# Altium PCB PCB1.PcbDoc
Units mil, origin at the board's own origin, x right, y up, seen from the top; angles counter-clockwise.
Board outline 1908.69 x 1796.09 mil, 2 copper layers (Top Layer, Bottom Layer); 16 components, 14 nets, 52 pads, 0 vias.
Unrouted connection lines stored in the file: 1.
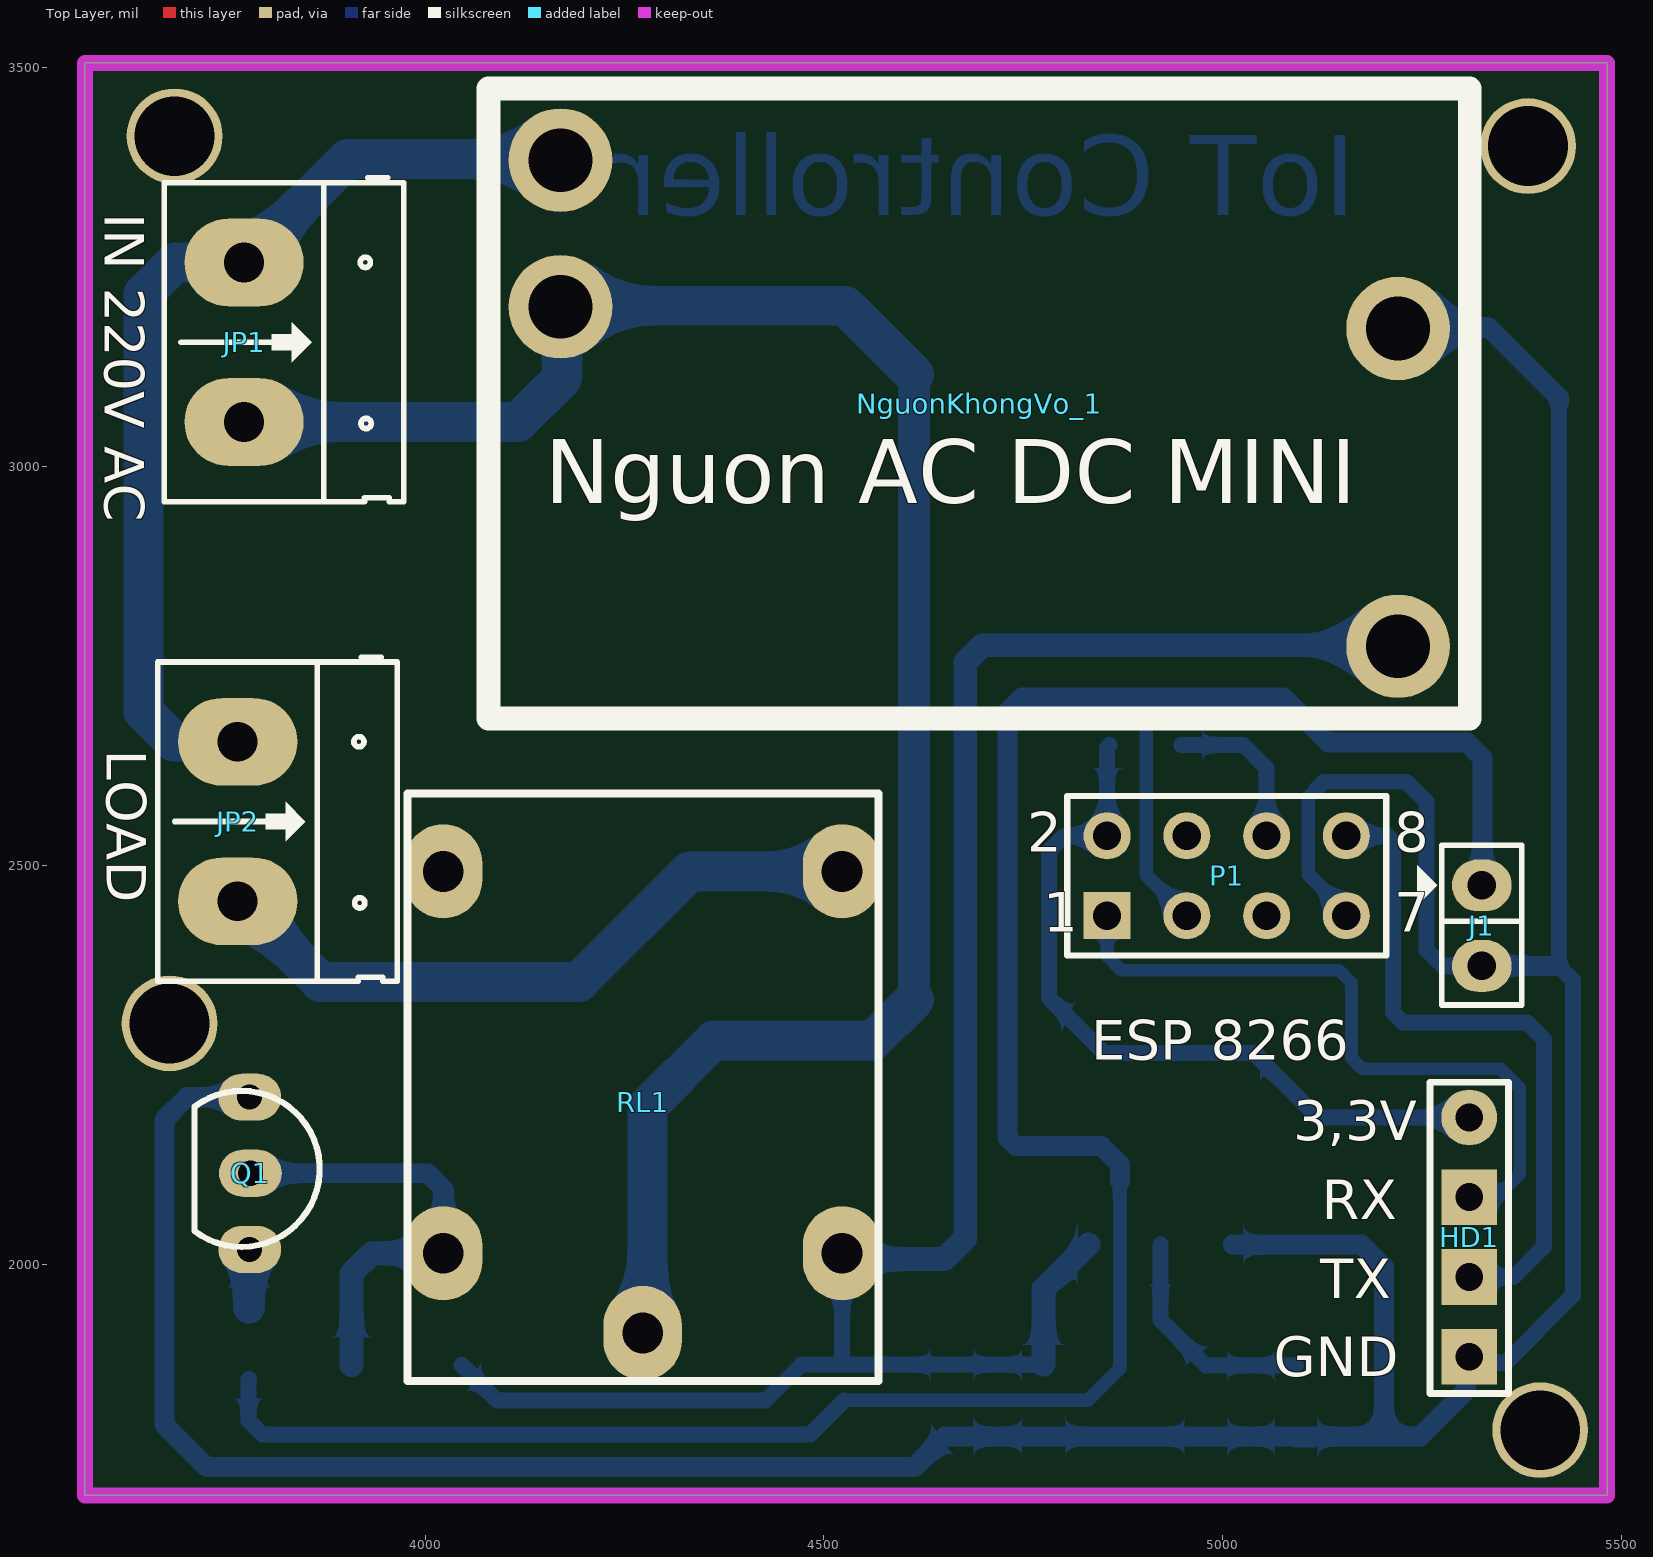
[diagram p0: Top Layer view]
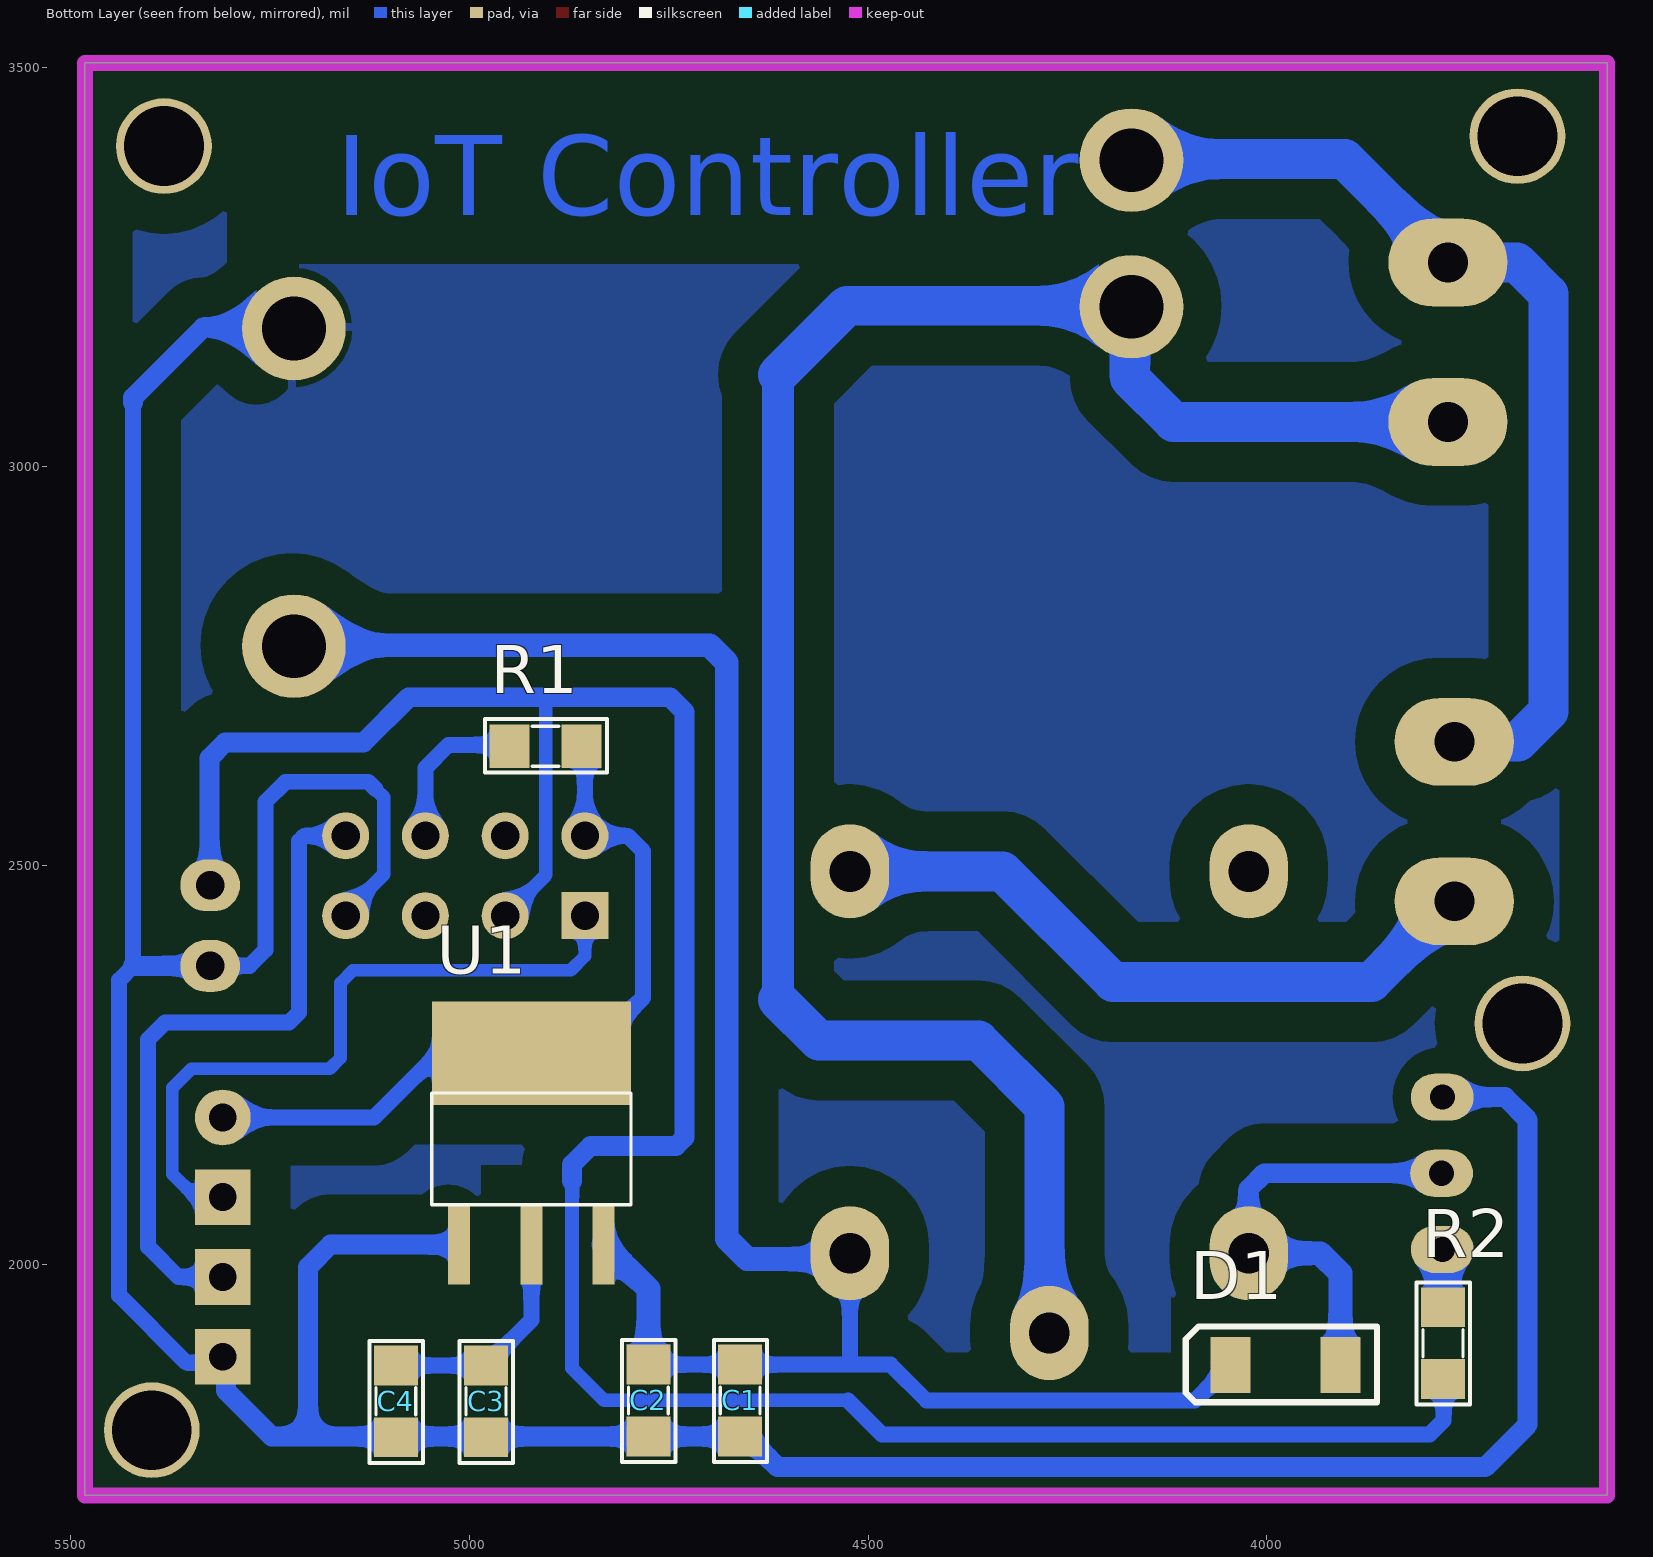
[diagram p1: Bottom Layer view, seen from below]
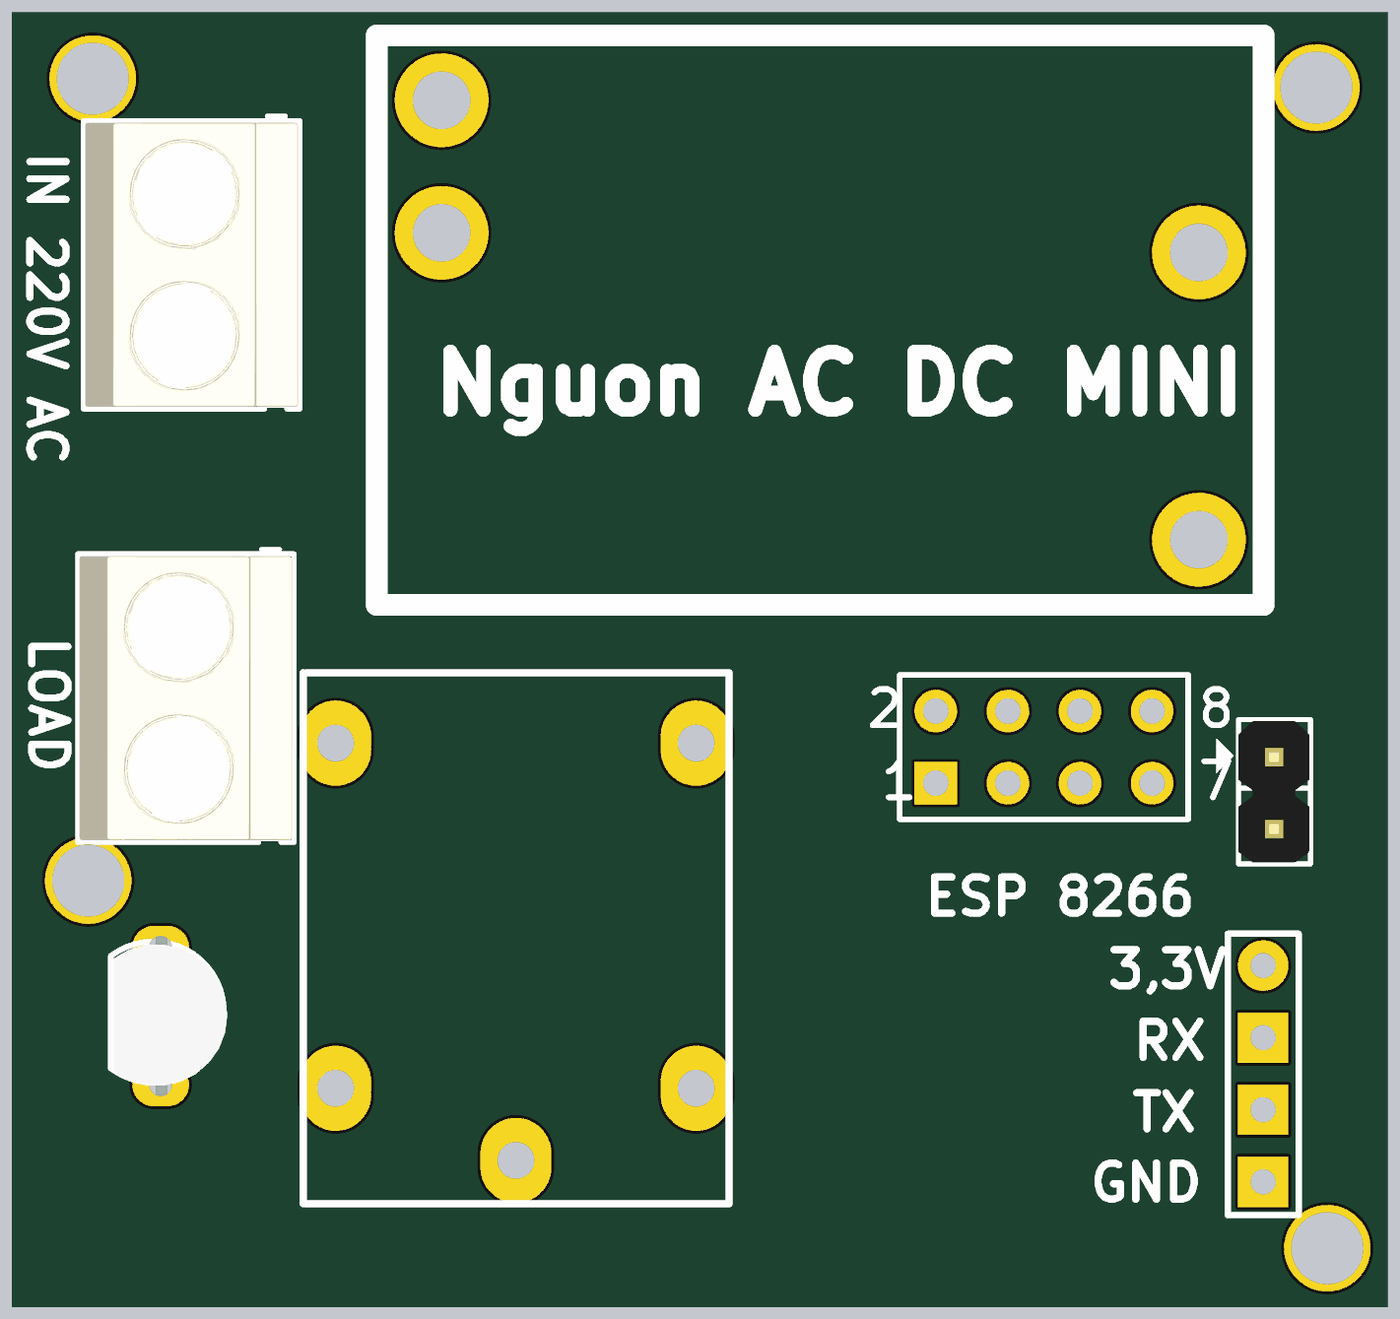
[diagram p2: 3D render of the assembled board from above, using the file's embedded part models]
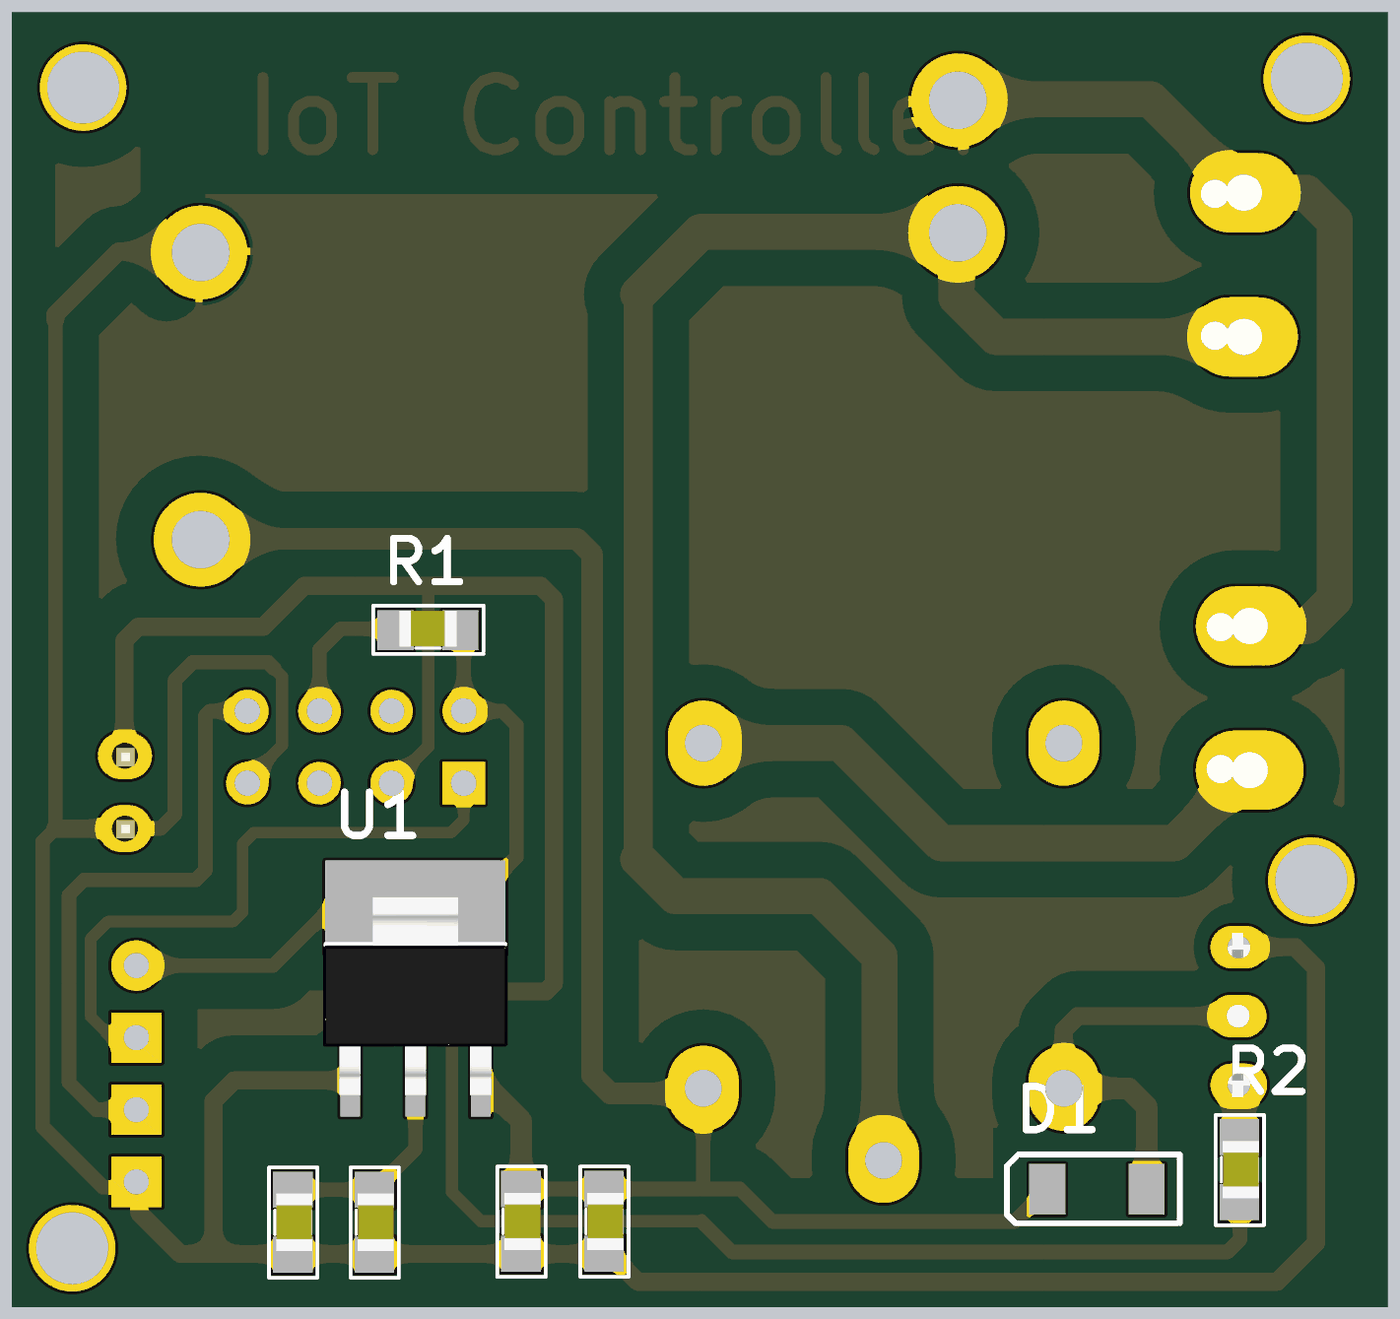
[diagram p3: 3D render of the assembled board from below, using the file's embedded part models]

## Layer stack, top to bottom
Top Solder: solder mask 0.4, Solder Resist, Dk 3.5
Top Layer: signal copper 1.4
Dielectric 1: dielectric 12.6, FR-4, Dk 4.8
Bottom Layer: signal copper 1.4
Bottom Solder: solder mask 0.4, Solder Resist, Dk 3.5

## Board outline
3573.33,1710.14 3573.33,3506.24 5482.02,3506.24 5482.02,1710.14

## Design rules (kind name [scope] priority, off if disabled: settings)
Clearance [All] p1: gap=50 ignorepadtopadclearanceinfootprint=FALSE except(0: Arc-Hole Track-Hole SMDPad-Hole THPad-Hole Via-Hole Fill-Hole Poly-Hole Region-Hole Text-Hole)
PolygonConnect [All] p1: connectstyle=Relief reliefconductorwidth=10 reliefentries=4 polygonreliefangle="90 Angle" airgapwidth=10
RoutingVias [All] p1: holewidth=28 width=50 viastyle="Through Hole" minholewidth=28 minwidth=50 maxholewidth=28 maxwidth=50
SolderMaskExpansion [All] p1: expansion=4
Width [All] p1: maxlimit=50 minlimit=10 preferedwidth=25
30 further rules are at their usual default settings.

## Classes and differential pairs
component class Sheet1: D1 R1 R2 U1

## Components (designator, comment, footprint, x,y, rotation, side; value= is the part's Value field where it differs from the comment)
C1 "106" 0805_MH 4660.44,1829.19 r90 bottom
C2 "104" 0805_MH 4775.51,1829.19 r90 bottom
C3 "106" 0805_MH 4979,1828 r90 bottom
C4 "104" 0805_MH 5092,1828 r90 bottom
D1 "1N4007" "Diode zenner" 3976.84,1873.8 r180 bottom
HD1 "Header 4" "Jumper 4" 5309,2133 r270 top
J1 "Jumper 2" JP2 5324.8,2475.02 r270 top
JP1 "JP2" "CON 2" 3773,3256 r270 top
JP2 "JP2" "CON 2" 3765,2655 r270 top
NguonKhongVo_1 "NguonKhongVo_12v_400ma" NguonKhongVo_12V_400mA 4169.7,3384.15 r0 top
P1 "esp8266" HDR2X4 4855,2437 r0 top
Q1 "C1815" TRAN-LOWPOWER 3775.06,2119.47 r180 top
R1 "10k" 0805_MH 4904.52,2649.34 r0 bottom
R2 "1k" 0805_MH 3779.18,1900.97 r90 bottom
RL1 "Relay ?V - 10A" RELAY5PIN-10A 4272.75,1913.77 r0 top
U1 "LM1117-3.3V" LM1117-SOP 4922.02,2074.61 r180 bottom

## Footprints (in the part's own frame and the unit in brackets; to place one, negate y for a bottom-side part, rotate by r counter-clockwise, add the part's x,y. Pads: shape width x height; smd on the part's side, far side on the other; paste and mask are expansions set on the pad)
0805_MH [mil] "Compoment SMD 80x50mil"
  rect 50x55 smd: 1(-45,0) 2(45,0)
  silkscreen extent -77,-34 76,33, body extent -40,-27 40,23, height 24
"CON 2" [mil] "Header 2, 2 pin, hight 300mil, Pin to Pin 200, Colour Green"
  oval 110x149.61 hole 50: 1(0,0) 2(200,0)
  silkscreen extent -106,-100 300,200, body extent -97,-98 297,198, height 394
"Diode zenner" [mil]
  rect 50x70 smd: 1(68.9,0) 2(-68.9,0)
  silkscreen extent -125,-47 115,48
HDR2X4 [mm] "Connector; Header; 4x2 Position"
  rect 1.5x1.5 hole 0.9: 1(0,0)
  round 1.5 hole 0.9: 2(0,2.54) 3(2.54,0) 4(2.54,2.54) 5(5.08,0) 6(5.08,2.54) 7(7.62,0) 8(7.62,2.54)
  silkscreen extent -1.27,-1.27 8.89,3.81, body extent -1.27,-1.27 8.89,3.81, height 7
JP2 [mil]
  oval 65x75 hole 36: 1(0,0) 2(101,0)
  silkscreen extent -50,-81 150,50, body extent -48,-50 148,48, height 323
"Jumper 4" [mil]
  round 70 hole 35 unplated: 1(-51,0)
  rect 70x70 hole 35 unplated: 2(49,0) 3(149,0) 4(249,0)
  silkscreen extent -95,-49 295,49
LM1117-SOP [mm]
  rect 0.7x2.54 smd: 1(-2.3,-1.27) 2(0,-1.27) 3(2.3,-1.27)
  rect 6.35x3.302 smd: 2(0,4.826)
  silkscreen extent -3.17,0 3.18,3.56, body extent -3.25,-1.78 3.25,5.18, height 1.68
NguonKhongVo_12V_400mA [mil] "NguonKhongVo_12V_400mA"
  round 130 hole 80: 1(0,0) 2(0,-183.86) 3(1050.2,-609.45) 4(1050.2,-211.02)
  silkscreen extent -90,-700 1140,90
RELAY5PIN-10A [mm]
  oval 2.5x3 hole 1.3: 1(0,0) 2(-6.35,14.7) 3(6.35,14.7) 4(-6.35,2.54) 5(6.35,2.54)
  silkscreen extent -7.49,-1.52 7.51,17.18, body extent -7.49,-1.52 7.49,17.15, height 16
TRAN-LOWPOWER [mm] "TO, Flat Index; 3 In-Line, Axial Leads; Body Dia. 4.5mm; Leads 0.51 x 0.48 mm (max)"
  oval 2x1.5 hole 0.8: 1(-0.127,-2.286) 2(-0.151,0.139) 3(-0.127,2.564)
  silkscreen extent -2.35,-2.48 1.63,2.48, body extent -2.48,-2.79 1.52,3.01, height 11

## Part data
C1 C2 C3 C4: library part "CAP 0805"
D1: library part D1A, "Diode 1A"
HD1: library part Hed4, "Header 4 (Green)"
J1: library part "JP 2"
JP1 JP2: library part "JUMP 2", "JUMP DON DUC 2.54"
P1: library part "Header 4X2", "Header, 4-Pin, Dual row"
Q1: "NPN 600mW, ECB"
R1 R2: library part R1/4W, "Resistor 1/4W"
RL1: library part "Relay 10A", "Relay SPDT,10A - 12VDC 5 Pin"
U1: library part LM1117, "800mA Low-Dropout Linear Regulator"

## Free pads (board coordinates)
  round 120 hole 100: 2(3679.58,2301.88) 2(3685.84,3414.18) 2(5382.78,3401.83) 2(5397.98,1791.94)

## Nets (pads, with @x,y where several pads share a name; then routed paths per layer and width w, separated by ;. In a path a pad name is that pad's centre, name@x,y a point inside that pad or via, vN(x,y) a via of type N, cw(c..) or ccw(c..) an arc to the next point about the centre after c; other vN are vias at no path point)
3.3V: C3.2 C4.2 HD1.1 P1.2 R1.1 U1.2 | length 1257.2
  Bottom Layer w20: R1.1@4858,2651 4855,2648 P1.2 4801.37,2537 4781.9,2517.53 4781.9,2334.25 4851.54,2264.61 4922.02,2264.61 5038.66,2264.61 5119.26,2184 HD1.1 ; U1.2@4922.02,2024.61 4922.02,1929.98 C3.2 C4.2
220V: JP1.1 JP2.1 NguonKhongVo_1.1 | length 1251.9
  Bottom Layer w50: JP2.1 3685.09,2655 3646.9,2693.19 3646.9,3216.13 3686.77,3256 JP1.1 3902.45,3385.45 NguonKhongVo_1.1@4171.8,3385.45
CH_PD: P1.6 R1.2 | length 204
  Bottom Layer w20: R1.2@4948,2651 5026,2651 5055,2622 P1.6
GND: C1.1 C2.1 C3.1 C4.1 HD1.4 J1.2 NguonKhongVo_1.4 P1.7 Q1.1 U1.1 | length 4941.2
  Bottom Layer w17: 5117.42,2595.56 5106.97,2585.12 5106.97,2489.16 5155,2441.14 P1.7
  Bottom Layer w20: 5117.42,2595.56 5126.75,2604.89 5230.31,2604.89 5255.5,2579.7 5255.5,2394.04 5275.51,2374.02 J1.2 ; HD1.4 5316.5,1876.5 5354.72,1876.5 5439.05,1960.83 5439.05,2356.12 5421.32,2373.86 5421.32,3080.18
  Bottom Layer w25: Q1.1 3701.47,2209.47 3673,2181 3673,1798.8 3726.28,1745.52 4613.31,1745.52 4651.79,1784 4979,1784 5201.97,1784 ; U1.1 5173.97,2024.61 5201.97,1996.61 5201.97,1784 ; C4.1 C4.1@5114,1783 ; NguonKhongVo_1.4@5222,3174.43 5333.6,3174.43 5421.32,3086.71 5421.32,3080.18 ; HD1.4 5305,1880 5305,1841.41 5247.59,1784 5201.97,1784 ; J1.2@5316.36,2377.06 J1.2@5350.93,2377.06 ; J1.2 5421.15,2374.02 5421.32,2373.86
GPI0: J1.1 P1.3 R2.1 | length 3222.6
  Bottom Layer w17: 4525.25,1829.19 4830.69,1829.19 4871.19,1869.68 4871.19,2104.54 ; 4903.92,2704.65 4903.92,2488.08 P1.3
  Bottom Layer w20: R2.1 3778.47,1855.26 3778.47,1804.25 3796.05,1786.67 4482.74,1786.67 4525.25,1829.19
  Bottom Layer w25: 4871.19,2104.54 4871.19,2124.97 4848.01,2148.15 4740.69,2148.15 4730.05,2158.78 4730.05,2692.58 4748.27,2710.8 5075.83,2710.8 5132.68,2653.95 5306.26,2653.95 5325.47,2634.73 5325.47,2497.21 J1.1@5303.46,2475.19
GPI2: P1.5
IN220: JP1.2 NguonKhongVo_1.2 RL1.1 | length 2448.9
  Bottom Layer w30: RL1.1 RL1.1@4278.58,1919.6
  Bottom Layer w40: 4613.04,2331.77 4613.04,3115.16
  Bottom Layer w50: JP1.2 4117,3056 4171.8,3110.8 4171.8,3201.59 4526.61,3201.59 4613.04,3115.16 ; RL1.1@4278.58,1919.6 4278.58,2197.4 4361.63,2280.46 4561.73,2280.46 4613.04,2331.77
NetD1_1: D1.1 Q1.2 RL1.4 | length 569.4
  Bottom Layer w25: Q1.2 4003.33,2114 4023.12,2094.21 RL1.4@4023.12,2015.01
  Bottom Layer w30: D1.1 3907.95,1988.33 3933.39,2013.77 RL1.4
NetJP2_2: JP2.2 RL1.3 | length 866.4
  Bottom Layer w30: RL1.3@4522.75,2493.74 RL1.3@4532,2493.74
  Bottom Layer w50: JP2.2 3767.76,2455 3869.04,2353.72 4192.78,2353.72 4331.58,2492.51 RL1.3
NetQ1_3: Q1.3 R2.2 | length 72.9
  Bottom Layer w40: R2.2 3779.18,2017.65 Q1.3
RESET: P1.4
RX: HD1.2 P1.1 | length 874.9
  Bottom Layer w16: P1.1 4855,2386.29 4872.8,2368.49 5145.8,2368.49 5161.55,2352.75 5161.55,2258.58 5174.98,2245.15 5348.13,2245.15 5372.27,2221 5372.27,2112.92 5343.35,2084 HD1.2
TX: HD1.3 P1.8 | length 848.2
  Bottom Layer w20: P1.8 5206.77,2537 5213.25,2530.53 5213.25,2315.66 5226.11,2302.8 5381.51,2302.8 5402.51,2281.8 5402.51,2021.8 5364.7,1984 HD1.3
VCC: C1.2 C2.2 D1.2 NguonKhongVo_1.3 RL1.5 U1.3 | length 2521.9
  Bottom Layer w20: D1.2 4090.41,1829.13 4426.79,1829.13 4471.85,1874.19 C1.2 C2.2 ; 4522.75,1876.52 RL1.5
  Bottom Layer w30: RL1.5 4530.05,2006.48 4651.44,2006.48 4677.21,2032.25 4677.21,2754.54 4698.66,2776 NguonKhongVo_1.3@5222,2776 ; C2.2 4775.51,1968.65 U1.3
pads on no net: RL1.2

## Polygon pours and split planes (outlines as drawn)
GND on Bottom Layer "Bottom Layer-No Net" (solid, pour order 0): 3581.03,3488.93 3584.57,3485.39 3584.57,1728.53 3598.74,1714.36 5465.41,1714.36 5465.41,3485.39 5458.32,3492.48 3588.11,3492.48 3584.57,3488.93

## Keep-outs
Keep-Out Layer:
  the board outline again, w20

## Other copper
Bottom Layer:
  text "IoT Controller" at 5167.26,3314.93 h100

## Silkscreen, mask and mechanical layers (free items; w line width, h text height)
Top Overlay:
  text "IN 220V AC" at 3598.25,3317.59 h50 r270
  text "LOAD" at 3600.9,2645.07 h50 r270
  text "ESP 8266" at 4834.94,2256.3 h50
  text "3,3V" at 5088.51,2155.47 h50
  text "RX" at 5124.12,2056.26 h50
  text "TX" at 5122.43,1957.05 h50
  text "GND" at 5063.92,1859.54 h50

## Text inside footprints (layer, text, board x,y; h text height)
NguonKhongVo_1: Top Overlay "Nguon AC DC MINI" at 4149.7,2954.15 h80
P1: Top Overlay "8" at 5215,2517 h50; Top Overlay "7" at 5215,2417 h50; Top Overlay "1" at 4775,2417 h50; Top Overlay "2" at 4755,2517 h50